# EAGLE board logika (EAGLE 3.55)
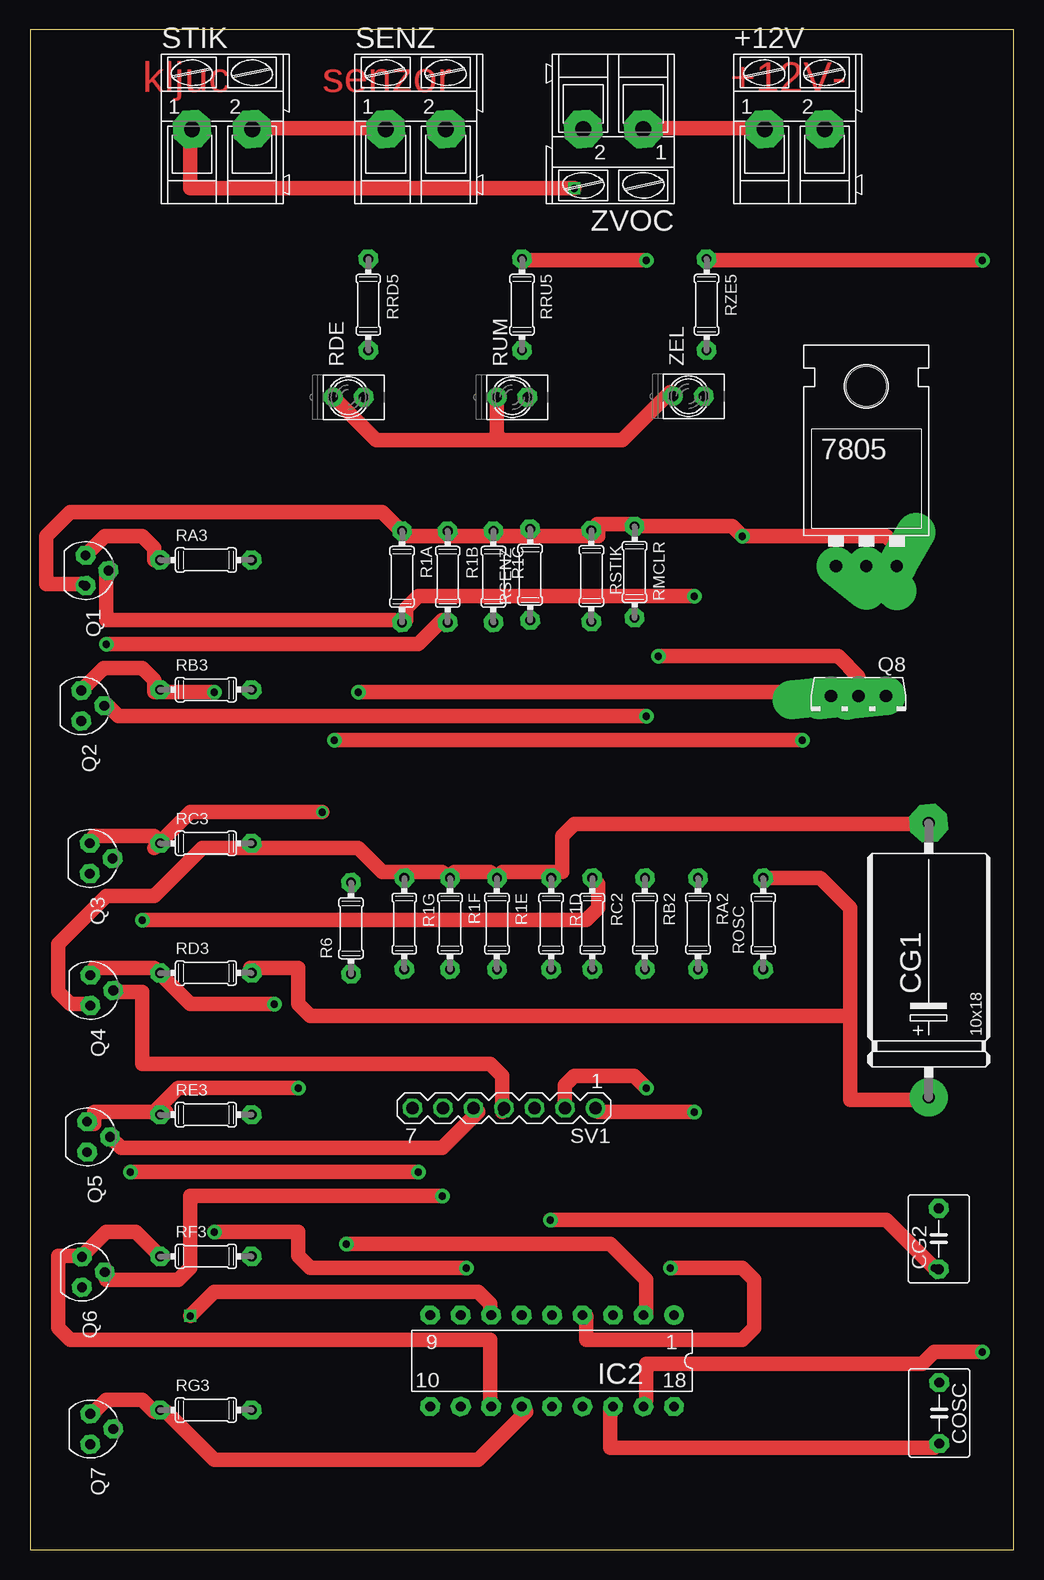
[diagram p0: board, top side]
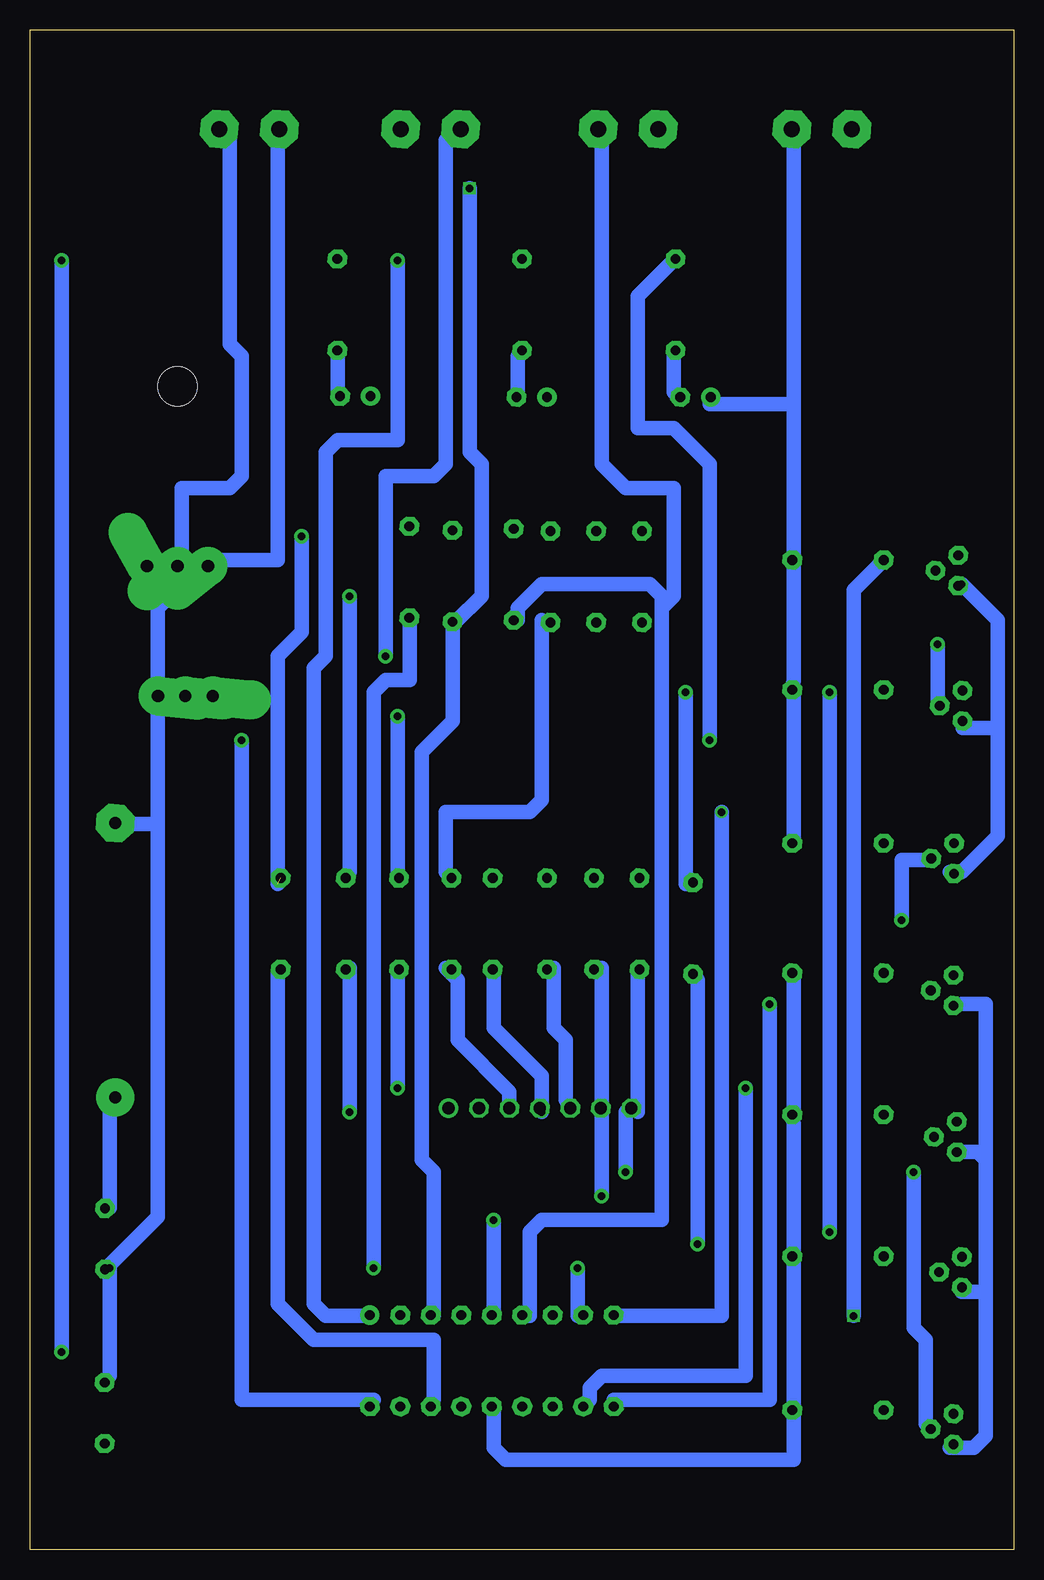
[diagram p1: board, bottom side, seen from below]

Size 81.99 x 126.67 mm. Coordinates in mm from the lower left corner, seen from the top.
Outline: 0,0 81.99,0 81.99,126.67 0,126.67 0,0
Copper layers used: Top, Bottom

## Footprints (pad centres in the part's own frame; a part is rotated, then mirrored left to right if it is on the bottom)
XXL = drill 1.016 pad 3.251 offset:  -2.54,-3.81;  0,-3.81;  2.54,-3.81 | hole 3.302: 0,11.176
300/2 = drill 1.321 pad 3.15 octagon:  -2.515,0;  2.489,0
2-10 = drill 1.016 pad 3.15 round:  -11.43,0 | drill 1.016 pad 3.15 octagon:  11.43,0
B5 = drill 0.813 pad 1.6 octagon:  -2.54,0;  2.54,0
L18 = drill 0.813 pad 1.6 round:  -10.16,-3.81 | drill 0.813 pad 1.6 octagon:  -7.62,-3.81;  -5.08,-3.81;  -2.54,-3.81;  0,-3.81;  2.54,-3.81;  5.08,-3.81;  7.62,-3.81;  10.16,-3.81;  10.16,3.81;  7.62,3.81;  5.08,3.81;  2.54,3.81;  0,3.81;  -2.54,3.81;  -5.08,3.81;  -7.62,3.81;  -10.16,3.81
T54A = drill 0.813 pad 1.6 octagon:  -1.27,0;  0,1.905;  1.27,0
126AS = drill 1.016 pad 3.251 offset:  -2.286,-1.27;  0,-1.27;  2.286,-1.27
04/7 = drill 0.813 pad 1.6 octagon:  -3.81,0;  3.81,0
52 = drill 0.813 pad 1.6 round:  -1.27,0 | drill 0.813 pad 1.6 octagon:  1.27,0
07-1 = drill 1.016 pad 1.6 round:  -7.62,0 | drill 1.016 pad 1.6 octagon:  -5.08,0;  -2.54,0;  0,0;  2.54,0;  5.08,0;  7.62,0

## Placement (x,y rotation side)
7805  78XXL  [XXL]  69.7,85.78 0 top
+12V  AK300/2  [300/2]  63.73,118.41 0 top
CG1  E22-10  [2-10]  74.89,49.13 90 top
CG2  C5B5  [B5]  75.73,25.9 90 top
COSC  C5B5  [B5]  75.77,11.38 270 top
IC2  16F84P  [L18]  43.51,15.74 180 top
Q1  BC557  [T54A]  4.63,81.61 270 top
Q2  BC557  [T54A]  4.28,70.34 270 top
Q3  BC557  [T54A]  4.98,57.61 270 top
Q4  BC547  [T54A]  5.03,46.61 270 top
Q5  BC547  [T54A]  4.76,34.4 270 top
Q6  BC547  [T54A]  4.33,23.13 270 top
Q7  BC547  [T54A]  5.03,10.05 270 top
Q8  BD437  [126AS]  69.04,69.89 180 top
R1A  0204/7  [04/7]  31,81.09 270 top
R1B  0204/7  [04/7]  34.81,81.09 270 top
R1C  0204/7  [04/7]  38.62,81.09 270 top
R1D  0204/7  [04/7]  43.43,52.17 270 top
R1E  0204/7  [04/7]  38.91,52.17 270 top
R1F  0204/7  [04/7]  35,52.17 270 top
R1G  0204/7  [04/7]  31.19,52.17 270 top
R6  0204/7  [04/7]  26.75,51.79 90 top
RA2  0204/7  [04/7]  55.67,52.17 270 top
RA3  0204/7  [04/7]  14.66,82.49 0 top
RB2  0204/7  [04/7]  51.24,52.17 270 top
RB3  0204/7  [04/7]  14.66,71.68 0 top
RC2  0204/7  [04/7]  46.86,52.17 270 top
RC3  0204/7  [04/7]  14.66,58.87 0 top
RD3  0204/7  [04/7]  14.66,48.06 0 top
RDE  B152  [52]  26.53,96.06 0 top
RE3  0204/7  [04/7]  14.66,36.25 0 top
RF3  0204/7  [04/7]  14.66,24.44 0 top
RG3  0204/7  [04/7]  14.66,11.63 0 top
RMCLR  0204/7  [04/7]  50.38,81.49 270 top
ROSC  0204/7  [04/7]  61.1,52.17 90 top
RRD5  0204/7  [04/7]  28.19,103.77 270 top
RRU5  0204/7  [04/7]  41,103.77 270 top
RSENZ  0204/7  [04/7]  41.68,81.27 90 top
RSTIK  0204/7  [04/7]  46.78,81.15 270 top
RUM  B152  [52]  40.18,96.06 0 top
RZE5  0204/7  [04/7]  56.38,103.77 270 top
SENZ  AK300/2  [300/2]  32.16,118.41 0 top
STIK  AK300/2  [300/2]  16.02,118.41 0 top
SV1  MA07-1  [07-1]  39.5,36.79 180 top
ZEL  B152  [52]  54.88,96.14 0 top
ZVOC  AK300/2  [300/2]  48.59,118.41 180 top

## Library data of the parts
7805 = v-reg
+12V SENZ STIK ZVOC = ptr500
CG1 = polcap
CG2 COSC = cap
IC2 = pic
Q1-Q7 = trans-sm
Q8 = trans-pw
R1A R1B R1C R1D R1E R1F R1G R6 RA2 RA3 RB2 RB3 RC2 RC3 RD3 RE3 RF3 RG3 RMCLR ROSC RRD5 RRU5 RSENZ RSTIK RZE5 = r
RDE RUM ZEL = led
SV1 = con-lstb

## Nets
+5V: 7805. CG1. CG2. IC2. Q1. Q2. Q3. R1A. R1B. R1C. RD3. RE3. RF3. RG3. RMCLR. ROSC. RSENZ. RSTIK.
+12V: 7805. +12V. ZVOC.
GND: 7805. +12V. CG1. CG2. COSC. IC2. Q4. Q5. Q6. Q7. Q8. R1D. R1E. R1F. R1G. RA3. RB3. RC3. RDE. RUM. SENZ. STIK. ZEL.
N$1: Q8. ZVOC.
N$2: IC2. Q1. RA3.
N$3: IC2. Q2. RB3.
N$4: Q1. R1A. RA2.
N$7: IC2. RSENZ. SENZ.
N$8: IC2. RZE5.
N$9: IC2. RRD5.
N$10: IC2. RRU5.
N$11: Q2. R1B. RB2.
N$12: IC2. R6.
N$13: Q3. R1C. RC2.
N$14: Q8. R6.
N$15: IC2. RMCLR.
N$16: COSC. IC2. ROSC.
N$17: IC2. RSTIK. STIK.
N$18: RA2. SV1.
N$19: RB2. SV1.
N$20: RC2. SV1.
N$21: Q4. R1D. SV1.
N$22: RZE5. ZEL.
N$23: RDE. RRD5.
N$24: RRU5. RUM.
N$25: Q5. R1E. SV1.
N$26: Q6. R1F. SV1.
N$27: Q7. R1G. SV1.
N$28: IC2. Q7. RG3.
N$29: IC2. Q3. RC3.
N$30: IC2. Q4. RD3.
N$31: IC2. Q5. RE3.
N$32: IC2. Q6. RF3.

## Tracks (layer width: path | path; a pad name or v marks a point on that pad's centre or on a via)
+5V  (via drill 0.61 pad 1.02, 0.61 pad 1.2)  (1 unrouted)
  Top 1.2: 31.36,84.47 31,84.9 | 34.36,84.47 34.81,84.9 35.36,84.47 | 7805. 72.36,83.47 71.36,84.47 v59.36,84.47 58.53,85.3 50.38,85.3 50.36,85.32 50.36,85.47 47.29,85.47 46.78,84.96 46.36,84.47 | 68.36,44.47 68.36,37.47 73.36,37.47 74.89,37.7 | 68.36,44.47 23.36,44.47 22.36,45.47 22.36,48.47 18.36,48.47 RD3. | v4.36,80.47 1.36,80.47 1.36,84.47 3.36,86.47 29.36,86.47 31.36,84.47 | 34.36,84.47 31.36,84.47 | 35.36,84.47 34.36,84.47 | 35.36,84.47 38.36,84.47 38.62,84.9 39.05,84.47 41.36,84.47 | 46.36,84.47 41.36,84.47 | 46.36,84.47 47.36,84.47 47.36,85.47 | 41.36,84.47 RSENZ. | ROSC. 65.85,55.98 68.36,53.47 68.36,44.47
  Bottom 1.2: CG2. 75.36,28.47 75.36,36.47 74.89,37.7 | 18.36,11.47 18.36,24.47 | 18.36,24.47 18.36,35.47 RE3. 18.36,36.47 18.36,47.47 RD3. | 18.36,24.47 RF3. | 18.36,11.47 18.36,7.47 42.36,7.47 43.36,8.47 43.36,11.47 43.51,11.93 | 18.36,11.47 RG3. | 1.36,68.47 1.36,77.47 v4.36,80.47 Q1. | 1.36,68.47 1.36,59.47 4.36,56.47 | 4.36,56.47 5.36,56.47 | Q2. 4.28,68.47 1.36,68.47 | 4.36,56.47 Q3. | v59.36,84.47 59.36,76.47 61.36,74.47 61.36,55.47
+12V
  Top 1.2: 51.1,118.41 52.36,118.47 60.36,118.47 61.21,118.41
  Bottom 1.2: 67.16,81.97 66.36,82.47 61.36,82.47 61.36,117.47 61.21,118.41
GND  (via drill 0.61 pad 1.02, 0.61 pad 1.2)
  Top 1.2: 75.73,23.36 v75.36,23.47 71.36,27.47 v43.36,27.47 | STIK. 19.36,118.47 28.36,118.47 29.64,118.41 | 31.36,56.47 34.36,56.47 35,55.98 35.36,56.47 38.36,56.47 38.91,55.98 39.36,56.47 43.36,56.47 | 31.36,56.47 29.36,56.47 27.36,58.47 18.36,58.47 | 31.36,56.47 31.19,55.98 | Q4. 4.36,45.47 3.36,45.47 2.36,46.47 2.36,50.47 6.36,54.47 10.36,54.47 14.36,58.47 18.36,58.47 | 18.36,58.47 RC3. | 43.36,56.47 44.36,56.47 44.36,59.47 45.36,60.47 73.36,60.47 CG1. | 43.36,56.47 43.43,55.98 | 25.26,96.06 28.85,92.47 39.36,92.47 | 39.36,92.47 49.36,92.47 53.36,96.47 53.61,96.14 | 38.91,96.06 38.91,92.92 39.36,92.47
  Bottom 1.2: v43.36,27.47 43.36,19.47 43.51,19.55 | 75.77,13.92 75.36,14.47 v75.36,23.47 75.73,23.36 71.36,27.73 71.36,60.47 | 71.36,60.47 71.36,70.47 71.33,71.16 71.36,72.47 71.36,78.47 69.7,80.13 69.7,81.97 69.36,83.47 69.36,88.47 65.36,88.47 64.36,89.47 64.36,99.47 65.36,100.47 65.36,117.47 +12V. | 2.36,32.47 2.36,45.47 4.36,45.47 Q4. | RC3. 18.36,59.47 18.36,71.47 RB3. 18.36,72.47 18.36,82.47 | 18.36,95.47 25.36,95.47 25.26,96.06 | 18.36,82.47 18.36,95.47 | 18.36,82.47 RA3. | 18.36,95.47 18.36,117.47 STIK. | Q5. 3.02,33.13 2.36,32.47 | CG1. 74.8,60.47 71.36,60.47 | 2.36,21.47 2.36,32.47 | 2.36,21.47 2.36,9.47 3.36,8.47 4.36,8.47 | 4.36,8.47 5.36,8.47 | Q6. 4.33,21.47 2.36,21.47 | 4.36,8.47 Q7.
N$1  (via drill 0.61 pad 1.2)
  Top 1.2: v52.36,74.47 67.36,74.47 69.04,72.79 69.04,71.16
  Bottom 1.2: v52.36,74.47 52.36,89.47 48.36,89.47 47.36,90.47 47.36,117.47 ZVOC.
N$2  (via drill 0.61 pad 1.02)
  Top 1.2: 38.43,19.55 38.36,19.47 38.36,20.47 37.36,21.47 15.36,21.47 v13.36,19.47 | 4.63,82.88 6.22,84.47 9.36,84.47 10.36,83.47 10.36,82.47 10.83,82.47 10.85,82.49
  Bottom 1.2: 10.85,82.49 13.36,79.98 v13.36,19.47
N$3  (via drill 0.61 pad 1.2)
  Top 1.2: v36.36,23.47 23.36,23.47 22.36,24.47 22.36,26.47 v15.36,26.47 | v15.36,71.47 11.36,71.47 10.85,71.68 10.36,71.47 10.36,72.47 9.36,73.47 6.14,73.47 4.28,71.61
  Bottom 1.2: v36.36,23.47 36.36,19.47 35.89,19.55 | v15.36,26.47 v15.36,71.47
N$4  (via drill 0.61 pad 1.2)
  Top 1.2: 6.54,81.61 6.36,81.47 6.36,77.47 30.36,77.47 R1A. 31.36,77.47 31.36,78.47 32.36,79.47 v55.36,79.47
  Bottom 1.2: v55.36,79.47 55.36,56.47 55.67,55.98
N$7
  Bottom 1.2: 29.36,78.47 29.36,27.47 39.36,27.47 40.36,26.47 40.36,19.47 40.97,19.55 | SENZ. 34.36,117.47 34.36,90.47 32.36,88.47 28.36,88.47 28.36,79.47 29.36,78.47 | 29.36,78.47 29.36,79.47 30.36,80.47 39.36,80.47 41.36,78.47 41.36,77.47 41.67,77.47 41.68,77.46
N$8  (via drill 0.61 pad 1.2)
  Top 1.2: v79.36,16.47 75.36,16.47 74.36,15.47 51.36,15.47 51.36,12.47 51.13,11.93 | v79.36,107.47 56.36,107.47 56.38,107.58
  Bottom 1.2: v79.36,16.47 v79.36,107.47
N$9  (via drill 0.61 pad 1.2)
  Top 1.2: v64.36,67.47 v25.36,67.47
  Bottom 1.2: v64.36,67.47 64.36,12.47 53.36,12.47 IC2. | v25.36,67.47 25.36,90.47 28.36,93.47 31.36,93.47 31.36,104.47 28.36,107.47 28.19,107.58
N$10  (via drill 0.61 pad 1.2)
  Top 1.2: v51.36,107.47 41.36,107.47 41,107.58
  Bottom 1.2: v51.36,107.47 51.36,92.47 56.36,92.47 57.36,91.47 57.36,74.47 58.36,73.47 58.36,20.47 57.36,19.47 54.36,19.47 53.67,19.55
N$11  (via drill 0.61 pad 1.2)
  Top 1.2: v6.36,75.47 32.36,75.47 34.36,77.47 34.55,77.28 R1B. | v51.36,69.47 7.36,69.47 6.36,70.47 6.19,70.34
  Bottom 1.2: v6.36,75.47 6.36,70.47 6.19,70.34 | v51.36,69.47 51.36,56.47 51.24,55.98
N$12  (via drill 0.61 pad 1.2)
  Top 1.2: v26.36,25.47 48.36,25.47 51.36,22.47 51.36,19.47 51.28,19.55 51.13,19.55
  Bottom 1.2: v26.36,25.47 26.36,47.47 26.75,47.98
N$13  (via drill 0.61 pad 1.2)
  Top 1.2: v9.36,52.47 46.36,52.47 47.36,53.47 47.36,55.47 46.86,55.98
  Bottom 1.2: v9.36,52.47 9.36,57.47 7.36,57.47 6.89,57.61 | R1C. 39.36,77.47 39.36,62.47 40.36,61.47 47.36,61.47 47.36,56.47 46.86,55.98
N$14  (via drill 0.61 pad 1.2)
  Top 1.2: v27.36,71.47 66.36,71.47 Q8.
  Bottom 1.2: v27.36,71.47 27.36,55.47 R6.
N$15  (via drill 0.61 pad 1.2)
  Top 1.2: 46.05,19.55 46.36,19.47 46.36,17.47 59.36,17.47 60.36,18.47 60.36,22.47 59.36,23.47 v53.36,23.47
  Bottom 1.2: RMCLR. 50.36,77.47 50.36,72.47 52.36,72.47 53.36,71.47 v53.36,23.47
N$16
  Top 1.2: 48.59,11.93 48.36,11.47 48.36,8.47 75.36,8.47 COSC.
  Bottom 1.2: 48.59,11.93 48.36,12.47 48.36,17.47 58.36,17.47 61.36,20.47 61.36,48.1 61.1,48.36
N$17  (via drill 0.61 pad 1.02)
  Top 1.2: v45.36,113.47 13.36,113.47 13.36,117.47 13.5,118.41
  Bottom 1.2: v45.36,113.47 45.36,91.47 44.36,90.47 44.36,79.47 46.49,77.34 RSTIK. 46.78,69.05 49.36,66.47 49.36,32.47 48.36,31.47 48.36,19.47 48.44,19.55 48.59,19.55
N$18  (via drill 0.61 pad 1.2)
  Top 1.2: v55.36,36.47 47.36,36.47 47.12,36.79
  Bottom 1.2: v55.36,36.47 55.36,48.47 RA2.
N$19  (via drill 0.61 pad 1.2)
  Top 1.2: 44.58,36.79 44.58,38.69 45.36,39.47 50.36,39.47 v51.36,38.47
  Bottom 1.2: v51.36,38.47 51.36,48.47 RB2.
N$20
  Bottom 1.2: 42.04,36.79 42.04,38.15 46.36,42.47 46.36,47.47 47.36,48.47 RC2.
N$21  (via drill 0.61 pad 1.02)
  Top 1.2: 6.94,46.61 7.36,46.47 9.36,46.47 9.36,40.47 38.36,40.47 39.36,39.47 v39.36,36.47 39.5,36.79
  Bottom 1.2: R1D. 43.36,48.47 43.36,43.47 39.36,39.47 v39.36,36.47
N$22
  Bottom 1.2: ZEL. 56.36,96.47 56.36,99.47 RZE5.
N$23
  Bottom 1.2: RDE. 28.36,96.47 28.36,99.47 RRD5.
N$24
  Bottom 1.2: RRU5. 41.36,99.47 41.36,96.47 RUM.
N$25
  Top 1.2: 6.67,34.4 7.59,33.47 34.36,33.47 37.36,36.47 36.96,36.79
  Bottom 1.2: R1E. 38.36,48.47 38.36,43.47 37.36,42.47 37.36,37.47 36.96,36.79
N$26  (via drill 0.61 pad 1.2)
  Top 1.2: v34.36,29.47 13.36,29.47 13.36,23.47 12.36,22.47 6.36,22.47 6.24,23.13
  Bottom 1.2: v34.36,29.47 34.36,36.47 34.42,36.79 34.36,37.47 34.36,48.47 R1F.
N$27  (via drill 0.61 pad 1.2)
  Top 1.2: v8.36,31.47 v32.36,31.47
  Bottom 1.2: v8.36,31.47 8.36,18.47 7.36,17.47 7.36,10.47 6.94,10.05 | v32.36,31.47 32.36,36.47 SV1. 31.36,36.47 31.36,48.47 R1G.
N$28
  Top 1.2: 5.03,11.32 5.36,11.47 6.36,12.47 9.36,12.47 10.36,11.47 10.85,11.63 11.36,11.47 15.36,7.47 37.36,7.47 41.36,11.47 40.97,11.93
N$29  (via drill 0.61 pad 1.02)
  Top 1.2: 4.98,58.88 5.36,59.47 10.36,59.47 10.85,58.87 10.36,58.47 13.36,61.47 v24.36,61.47
  Bottom 1.2: v24.36,61.47 24.36,19.47 33.36,19.47 33.35,19.55
N$30  (via drill 0.61 pad 1.2)
  Top 1.2: 5.03,47.88 5.36,48.47 10.36,48.47 10.85,48.06 11.36,47.47 13.36,45.47 v20.36,45.47
  Bottom 1.2: v20.36,45.47 20.36,12.47 33.36,12.47 33.35,11.93
N$31  (via drill 0.61 pad 1.2)
  Top 1.2: 10.36,36.47 5.36,36.47 5.36,35.47 4.76,35.67 | 10.36,36.47 10.85,36.25 11.36,36.47 10.36,36.47 | v22.36,38.47 12.36,38.47 10.36,36.47
  Bottom 1.2: v22.36,38.47 22.36,14.47 34.36,14.47 35.36,13.47 35.36,12.47 35.89,11.93
N$32
  Top 1.2: 4.36,24.47 2.36,24.47 2.36,18.47 3.36,17.47 38.36,17.47 38.36,12.47 38.43,11.93 | 4.36,24.47 4.33,24.4 | 10.85,24.44 8.82,26.47 6.36,26.47 4.36,24.47

## Text on the board
Top: kljuc | senzor | +12V-